# Altium PCB pcb_emmeteur.PcbDoc
Units mil, origin at the board's own origin, x right, y up, seen from the top; angles counter-clockwise.
Board outline 2935 x 3525 mil, 2 copper layers (Top Layer, Bottom Layer); 28 components, 26 nets, 109 pads, 0 vias.
Unrouted connection lines stored in the file: 1.
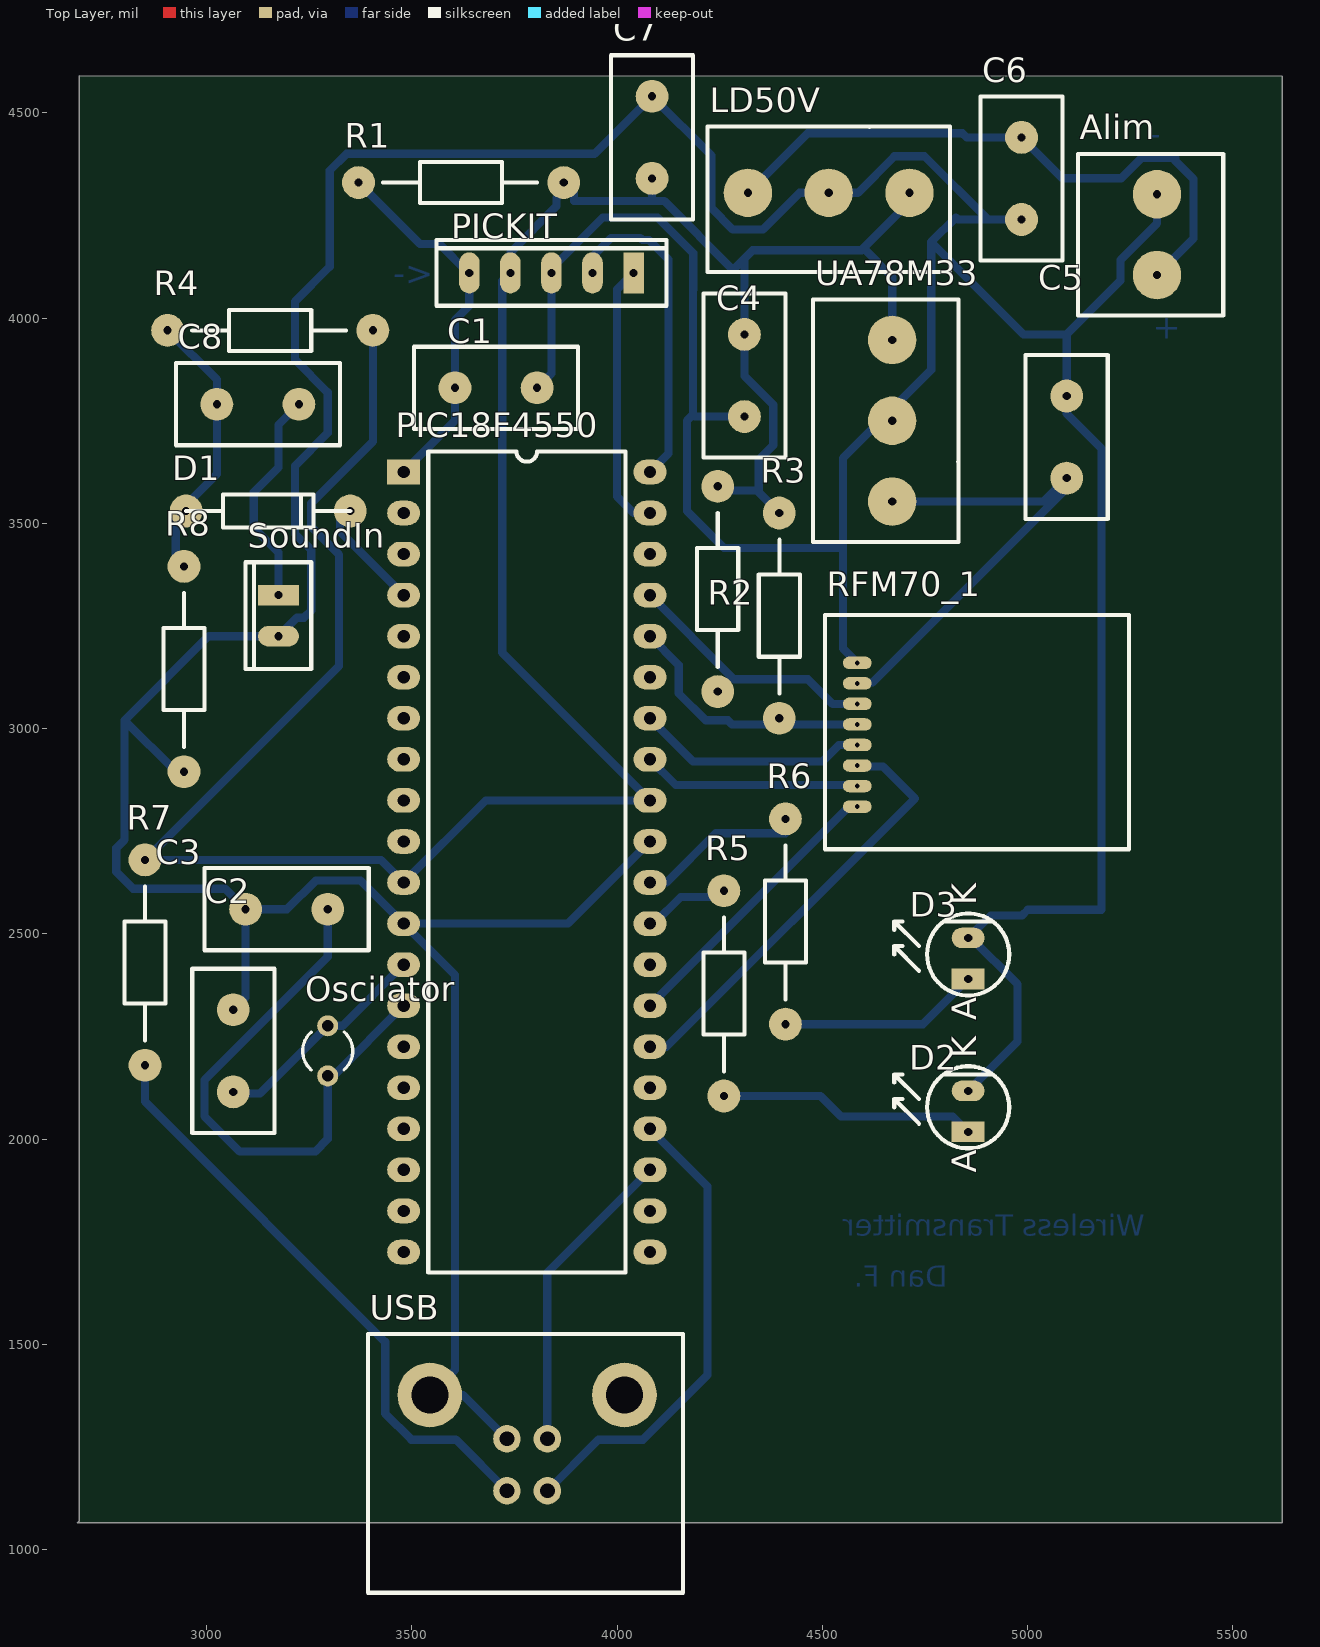
[diagram p0: Top Layer view]
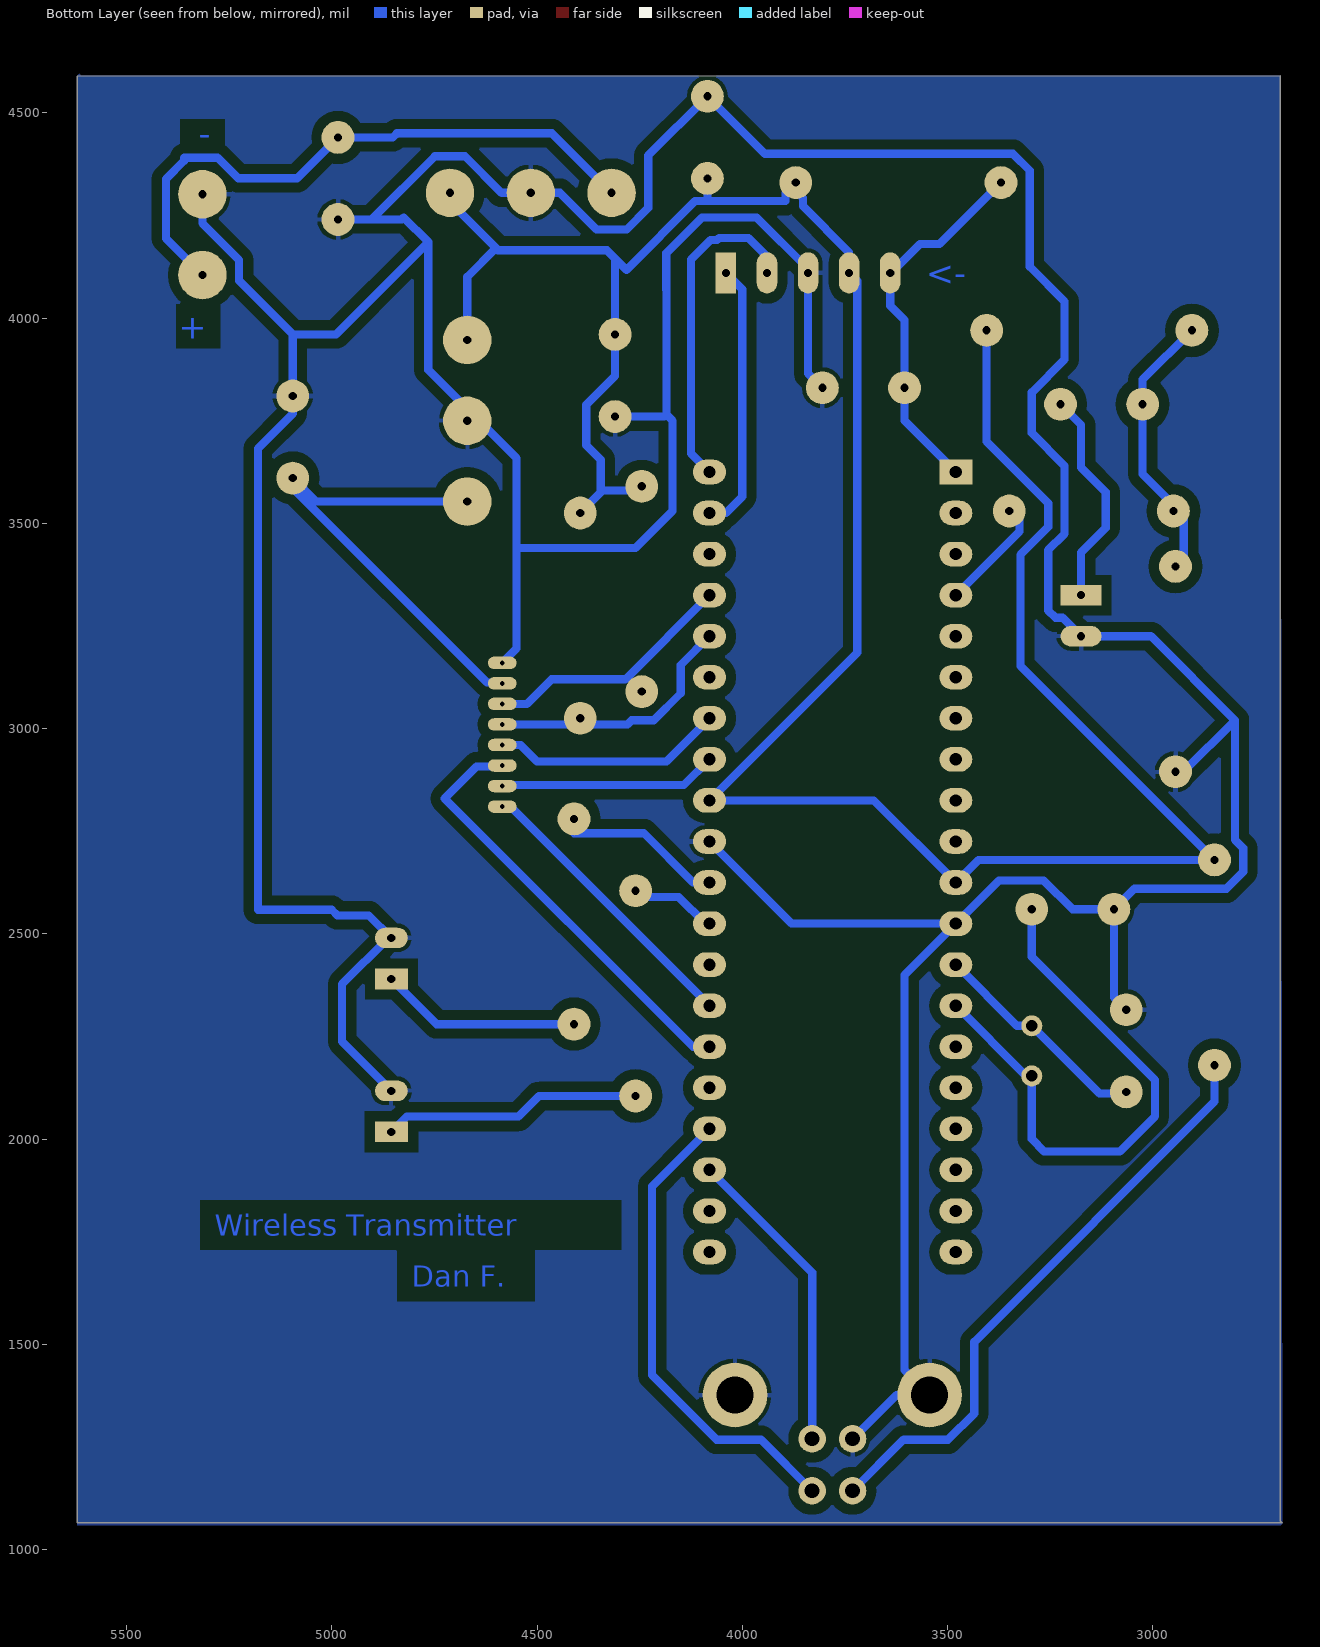
[diagram p1: Bottom Layer view, seen from below]

## Layer stack, top to bottom
Top Layer: signal copper 1.4
Dielectric: dielectric 12.6, FR-4, Dk 4.8
Bottom Layer: signal copper 1.4

## Board outline
2690,4590 2690,1070 2685,1065 5620,1065 5620,4588.71

## Design rules (kind name [scope] priority, off if disabled: settings)
Clearance [All] p1: gap=20
PolygonConnect [All] p1: connectstyle=Relief reliefconductorwidth=10 reliefentries=4 polygonreliefangle="90 Angle" airgapwidth=10
RoutingVias [All] p1: holewidth=28 width=50 viastyle="Through Hole" minholewidth=28 minwidth=50 maxholewidth=28 maxwidth=50
SolderMaskExpansion [All] p1: expansion=4
Width [All] p1: maxlimit=20 minlimit=20 preferedwidth=20
28 further rules are at their usual default settings.

## Components (designator, comment, footprint, x,y, rotation, side; value= is the part's Value field where it differs from the comment)
Alim "Bornier_2" Bornier_2 5315,4400 r270 top
C1 "Cap2" CAPA2 3805,3830 r180 top
C2 "Cap2" CAPA2 3065,2315 r270 top
C3 "Cap2" CAPA2 3095,2560 r0 top
C4 "Cap2" CAPA2 4310,3760 r90 top
C5 "Cap2" CAPA2 5095,3810 r270 top
C6 "Cap2" CAPA2 4985,4240 r90 top
C7 "Cap2" CAPA2 4085,4540 r270 top
C8 "Cap2" CAPA2 3025,3790 r0 top
D1 "Diode 1N4001" Ddiode 3350,3530 r180 top
D2 "Led" LED 4855,2017.5 r90 top
D3 "Led" LED 4855,2390 r90 top
LD50V "Bornier_3" Bornier_3 4220,4305 r0 top
Oscilator "HS 8Mhz" R38 3295,2215 r0 top
PIC18F4550 "PIC18F4550" "PIC18F4550 - DUPLICATE" 3480,3625 r0 top
PICKIT "CONKK5" CONKK5 4040,4110 r180 top
R1 "Res2" res5_1/4W 3370,4330 r0 top
R2 "Res2" res5_1/4W 4245,3090 r90 top
R3 "Res2" res5_1/4W 4395,3025 r90 top
R4 "Res2" res5_1/4W 2905,3970 r0 top
R5 "Res2" res5_1/4W 4260,2105 r90 top
R6 "Res2" res5_1/4W 4410,2280 r90 top
R7 "Res2" res5_1/4W 2850,2180 r90 top
R8 "Res2" res5_1/4W 2945,2895 r90 top
RFM70_1 "RFM70" RFM70 4585,3210 r270 top
SoundIn "CONKK2" CONKK2 3175,3325 r270 top
UA78M33 "Bornier_3" Bornier_3 4670,4045 r270 top
USB "USB Femele B" USB-B 3830,1270 r180 top

## Footprints (in the part's own frame and the unit in brackets; to place one, negate y for a bottom-side part, rotate by r counter-clockwise, add the part's x,y. Pads: shape width x height; smd on the part's side, far side on the other; paste and mask are expansions set on the pad)
Bornier_2 [mm]
  round 3 hole 0.508: 1(2.5,0) 2(7.5,0)
  silkscreen extent 0,-4.9 10,4.1
Bornier_3 [mm]
  round 3 hole 0.508: 1(2.5,0) 2(7.5,0) 3(12.5,0)
  silkscreen extent 0,-4.9 15,4.1
CAPA2 [mil]
  round 80 hole 20: 1(0,0) 2(200,0)
  silkscreen extent -100,-100 300,100
CONKK2 [mil]
  rect 50x100 hole 20: 1(0,0)
  oval 50x100 hole 20: 2(100,0)
  silkscreen extent -80,-80 180,80
CONKK5 [mil]
  rect 50x100 hole 20: 1(0,0)
  oval 50x100 hole 20: 2(100,0) 3(200,0) 4(300,0) 5(400,0)
  silkscreen extent -80,-80 480,80
Ddiode [mil]
  round 80 hole 20: A(400,0) K(0,0)
  silkscreen extent 0,-40 400,40
LED [mil]
  rect 50x80 hole 20: 1(0,0)
  oval 50x80 hole 20: 2(100,0)
  silkscreen extent -40,-100 160,180
"PIC18F4550 - DUPLICATE" [mil]
  rect 80x60 hole 30: 1(0,0)
  oval 80x60 hole 30: 2(0,-100) 3(0,-200) 4(0,-300) 5(0,-400) 6(0,-500) 7(0,-600) 8(0,-700) 9(0,-800) 10(0,-900) 11(0,-1000) 12(0,-1100) 13(0,-1200) 14(0,-1300) 15(0,-1400) 16(0,-1500) 17(0,-1600) 18(0,-1700) 19(0,-1800) 20(0,-1900) 21(600,-1900) 22(600,-1800) 23(600,-1700) 24(600,-1600) 25(600,-1500) 26(600,-1400) 27(600,-1300) 28(600,-1200) 29(600,-1100) 30(600,-1000) 31(600,-900) 32(600,-800) 33(600,-700) 34(600,-600) 35(600,-500) 36(600,-400) 37(600,-300) 38(600,-200) 39(600,-100) 40(600,0)
  silkscreen extent 60,-1950 540,50
R38 [mm] "Crystal, Thru-Hole; 2 Leads; Body 3.1 x 8.2 mm (Dia.xH)"
  round 1.3 hole 0.7: 1(0,1.55) 2(0,-1.55)
  silkscreen extent -1.55,-1.19 1.55,1.17
res5_1/4W [mil]
  round 80 hole 20: 1(0,0) 2(500,0)
  silkscreen extent 60,-50 435,50
RFM70 [mil]
  oval 30.43x70 hole 11.81: 1(50,0) 2(100,0) 3(150,0) 4(200,0) 5(250,0) 6(300,0) 7(350,0) 8(400,0)
  silkscreen extent -67,-79 504,661
USB-B [mm]
  round 1.7 hole 0.92: 1(2.5,3.215) 2(0,3.215) 3(0,0) 4(2.5,0)
  round 4 hole 2.3: 4(-4.77,-2.71) 4(7.27,-2.71)
  silkscreen extent -8.38,-6.48 11.09,9.52

## Part data
Alim: "Header, 2-Pin"
C1 C2 C3 C4 C5 C6 C7 C8: "Capacitor"
D1: "1 Amp General Purpose Rectifier"
D2 D3: "LED"
LD50V UA78M33: "Header, 3-Pin"
Oscilator: library part XTAL, "Crystal Oscillator"
R1 R2 R3 R4 R5 R6 R7 R8: "Resistor"

## Nets (pads, with @x,y where several pads share a name; then routed paths per layer and width w, separated by ;. In a path a pad name is that pad's centre, name@x,y a point inside that pad or via, vN(x,y) a via of type N, cw(c..) or ccw(c..) an arc to the next point about the centre after c; other vN are vias at no path point)
3V3: C5.2 RFM70_1.2 UA78M33.3 | length 1180.4
  Bottom Layer w20: RFM70_1.2 4587.28,3112.28 4622.28,3112.28 5095,3585 C5.2 5037.87,3552.87 UA78M33.3
5V: C4.2 C7.2 LD50V.3 PIC18F4550.11 PIC18F4550.32 PICKIT.4 R1.2 R2.2 R3.2 R4.2 R7.2 UA78M33.1 | length 6758.6
  Bottom Layer w20: R4.2 3405,3698.99 3255,3548.99 3255,3491.01 3322.5,3423.51 3322.5,3152.5 R7.2 3425,2680 PIC18F4550.11 3680,2825 PIC18F4550.32 3720,3185 3720,4090 PICKIT.4 3740,4160 3852.5,4272.5 3852.5,4292.5 3870,4310 R1.2 3895,4305 3895,4285 4090,4285 ; C7.2 4085,4290 4090,4285 ; R2.2 4255,3580 4345,3580 ; 4310,4145 C4.2 4310,3858.99 4380,3788.99 4380,3690 4345,3655 4345,3580 ; R3.2 4345,3575 4345,3580 ; UA78M33.1 4670,4100.55 4600.28,4170.28 ; LD50V.3 4712.13,4282.13 4600.28,4170.28 ; 4090,4285 4115,4285 4282.5,4117.5 4330,4165 4595,4165 4600.28,4170.28
CE: PIC18F4550.37 R2.1 RFM70_1.3 | length 614.8
  Bottom Layer w20: PIC18F4550.37 4285,3120 4465,3120 4525,3060 RFM70_1.3
CSN: PIC18F4550.36 R3.1 RFM70_1.4 | length 652.7
  Bottom Layer w20: PIC18F4550.36@4080,3210 PIC18F4550.36 4150,3155 4150,3086.01 4216.01,3020 4270,3020 4280,3010 RFM70_1.4 RFM70_1.4@4587.28,3007.72
D+: PIC18F4550.24 USB.2 | length 1164.6
  Bottom Layer w20: USB.2 3954.53,1267.95 4062.84,1267.95 4220,1425.12 4220,1885 PIC18F4550.24
D-: PIC18F4550.23 USB.3 | length 758.6
  Bottom Layer w20: USB.3 3830,1675 PIC18F4550.23
DEBUG1: PIC18F4550.28 | length 5
  Bottom Layer w20: PIC18F4550.28 PIC18F4550.28@4085,2425
DEBUG2: PIC18F4550.29 R5.2 | length 236.4
  Bottom Layer w20: PIC18F4550.29 4090,2525 4155,2590 4240,2590 R5.2@4275,2625
DEBUG3: PIC18F4550.30 R6.2 | length 379.7
  Bottom Layer w20: PIC18F4550.30 4120,2625 4240,2745 R6.2@4410,2745
GND: Alim.1 C1.1 C2.1 C3.1 C4.1 C5.1 C6.1 C7.1 D2.2 D3.2 LD50V.2 PIC18F4550.12 PIC18F4550.31 PICKIT.3 R8.1 RFM70_1.1 SoundIn.2 UA78M33.2 USB.4 | length 13968.7
  Bottom Layer w20: R8.1 2925,2895 2800,3020 ; C2.1 3095,2345 C3.1 ; USB.4@3731.57,1270 3624.88,1376.69 3543.78,1376.69 3605,1437.91 3605,2400 PIC18F4550.12 ; C1.1 3840,3865 PICKIT.3 3840,4120 3965,4245 4098.43,4245 4185.25,4158.18 4185.25,4068.68 4185,4068.43 4185,3765 4170,3750 4170,3530 4260,3440 4550,3440 ; PIC18F4550.31 3880,2525 PIC18F4550.12 ; 4190,3760 C4.1 ; RFM70_1.1 4550,3195 4550,3658.52 4765,3873.52 4765,4185 ; D2.2 4975,2237.5 4975,2377.43 4862.43,2490 D3.2 4910,2545 4986.57,2545 5000.19,2558.62 5180,2558.62 5180,3682.24 5095,3767.24 C5.1 5095,3960 ; C6.1 4903.07,4240 ; Alim.1 5315,4230.67 5225.94,4141.61 5225.94,4090.94 5095,3960 ; 2800,3020 3005,3225 SoundIn.2 3220,3270 3237.43,3270 3255,3287.57 3255,3434.44 3215,3474.44 3215,3640 3295,3720 3295,3818.99 3215,3898.99 3215,4040 3300,4125 3300,4358.99 3341.01,4400 3945,4400 C7.1 4229.37,4395.63 4229.37,4268.11 4281.54,4215.94 4355.31,4215.94 4444.37,4305 LD50V.2 4586.18,4305 4675.24,4394.06 4749.01,4394.06 4903.07,4240 ; 2800,3020 2800,2728.99 2780,2708.99 2780,2651.01 2821.01,2610 3045,2610 C3.1 ; C3.1 3196.01,2560 3266.01,2630 3375,2630 PIC18F4550.12 ; 4765,4185 4990,3960 5095,3960 ; 4765,4185 4825,4245 4830,4240 4903.07,4240
IRQ: PIC18F4550.27 RFM70_1.8 | length 705.9
  Bottom Layer w20: PIC18F4550.27 4565,2810 RFM70_1.8
NetC1_2: C1.2 PIC18F4550.1 PICKIT.5 R1.1 | length 912.4
  Bottom Layer w20: R1.1 3520.02,4179.98 3567.4,4179.98 3637.38,4110 PICKIT.5 3640,4030 3605,3995 C1.2 3605,3750 PIC18F4550.1
NetC2_2: C2.2 Oscilator.1 PIC18F4550.13 | length 546.7
  Bottom Layer w20: C2.2 3068.98,2111.02 3130,2111.02 Oscilator.1 3331.02,2276.02 PIC18F4550.13
NetC3_2: C3.2 Oscilator.2 PIC18F4550.14 | length 1387
  Bottom Layer w20: C3.2 3295,2443.99 2995,2143.99 2995,2055.54 3080.54,1970 3265,1970 3295,2000 Oscilator.2 3295,2155 3310,2155 PIC18F4550.14
NetC8_1: C8.1 D1.A R4.1 R8.2 | length 674.4
  Bottom Layer w20: R4.1 3025,3850 C8.1 3025,3620 2925,3520 2925,3415 R8.2
NetC8_2: C8.2 SoundIn.1 | length 535.4
  Bottom Layer w20: SoundIn.1 3175,3428.75 3115,3488.75 3115,3576.25 3175,3636.25 3175,3740 C8.2
NetD2_1: D2.1 R5.1 | length 631.2
  Bottom Layer w20: R5.1 4495,2105 4545,2055 4817.5,2055 D2.1
NetD3_1: D3.1 R6.1 | length 490.6
  Bottom Layer w20: R6.1 4745,2280 D3.1
NetR7_1: R7.1 USB.1 | length 1465.2
  Bottom Layer w20: R7.1 2850,2091.38 3435.04,1506.34 3435.04,1331.65 3498.74,1267.95 3607.05,1267.95 USB.1
PGC: PIC18F4550.39 PICKIT.1 | length 658.1
  Bottom Layer w20: PICKIT.1 4000,4070 4000,3565 4040,3525 PIC18F4550.39
PGD: PIC18F4550.40 PICKIT.2 | length 801.5
  Bottom Layer w20: PICKIT.2 3940,4150 3985,4195 4056.48,4195 4061.48,4190 4077.43,4190 4125,4142.43 4125,3670 PIC18F4550.40
SCK: PIC18F4550.34 RFM70_1.5 | length 565.1
  Bottom Layer w20: PIC18F4550.34 4185,2920 4500,2920 4540,2960 RFM70_1.5
SDI: PIC18F4550.33 RFM70_1.7 | length 531.9
  Bottom Layer w20: PIC18F4550.33 4142.72,2862.28 4582.72,2862.28 RFM70_1.7
SDO: PIC18F4550.26 RFM70_1.6 | length 1068.7
  Bottom Layer w20: PIC18F4550.26 4120,2225 4725,2830 4647.28,2907.72 4587.28,2907.72 RFM70_1.6
"SOUND IN": D1.K PIC18F4550.4 | length 259.2
  Bottom Layer w20: D1.K@3325,3520 3325,3480 PIC18F4550.4
VIN: Alim.2 C6.2 LD50V.1 | length 1508.6
  Bottom Layer w20: LD50V.1 4463.43,4450 4841.57,4450 4851.57,4440 C6.2 5084.72,4340.28 5227.76,4340.28 5278.11,4390.63 5359.37,4390.63 5359.37,4383.15 5404.06,4338.46 5404.06,4193.78 Alim.2
pads on no net: PIC18F4550.2 PIC18F4550.3 PIC18F4550.5 PIC18F4550.6 PIC18F4550.7 PIC18F4550.8 PIC18F4550.9 PIC18F4550.10 PIC18F4550.15 PIC18F4550.16 PIC18F4550.17 PIC18F4550.18 PIC18F4550.19 PIC18F4550.20 PIC18F4550.21 PIC18F4550.22 PIC18F4550.25 PIC18F4550.35 PIC18F4550.38

## Polygon pours and split planes (outlines as drawn)
GND on Bottom Layer "Bottom Layer-No Net" (solid, remove dead copper, pour order 5): 2690,4590 5610,4590 5615,4595 5620,4590 5620,1060 2685,1060

## Other copper
Bottom Layer:
  text "-" at 5295,4420 h60
  text "->" at 3455,4080 h60
  text "+" at 5305,3950 h60
  text "Wireless Transmitter" at 5285,1765 h51.18
  text "Dan F." at 4805,1640 h51.18

## Text inside footprints (layer, text, board x,y; h text height)
D2: Top Overlay "A" at 4875,1917.5 h60 r90; Top Overlay "K" at 4875,2197.5 h60 r90
D3: Top Overlay "A" at 4875,2290 h60 r90; Top Overlay "K" at 4875,2570 h60 r90